# Altium PCB PCB1.PcbDoc
Units mm, origin at the board's own origin, x right, y up, seen from the top; angles counter-clockwise.
Board outline 37 x 28 mm, 2 copper layers (Top Layer, Bottom Layer); 4 components, 4 nets, 22 pads, 0 vias.
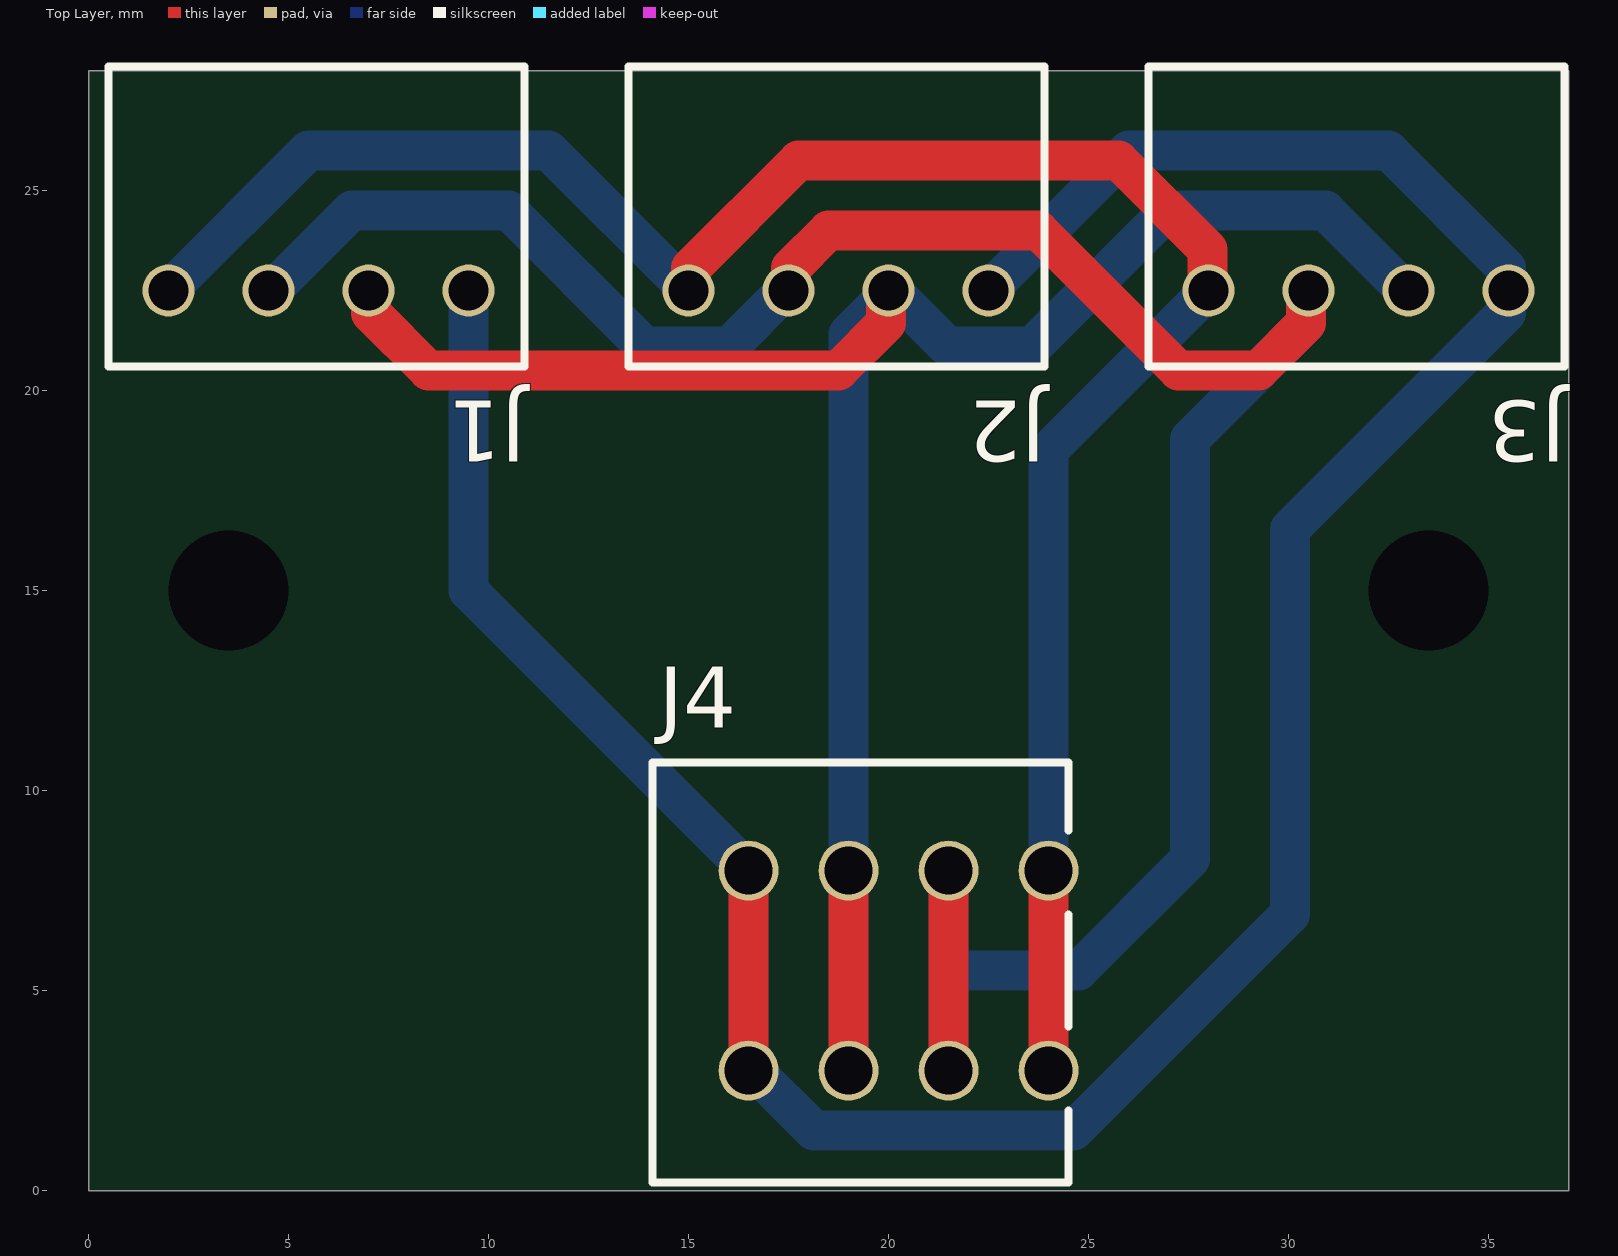
[diagram p0: Top Layer view]
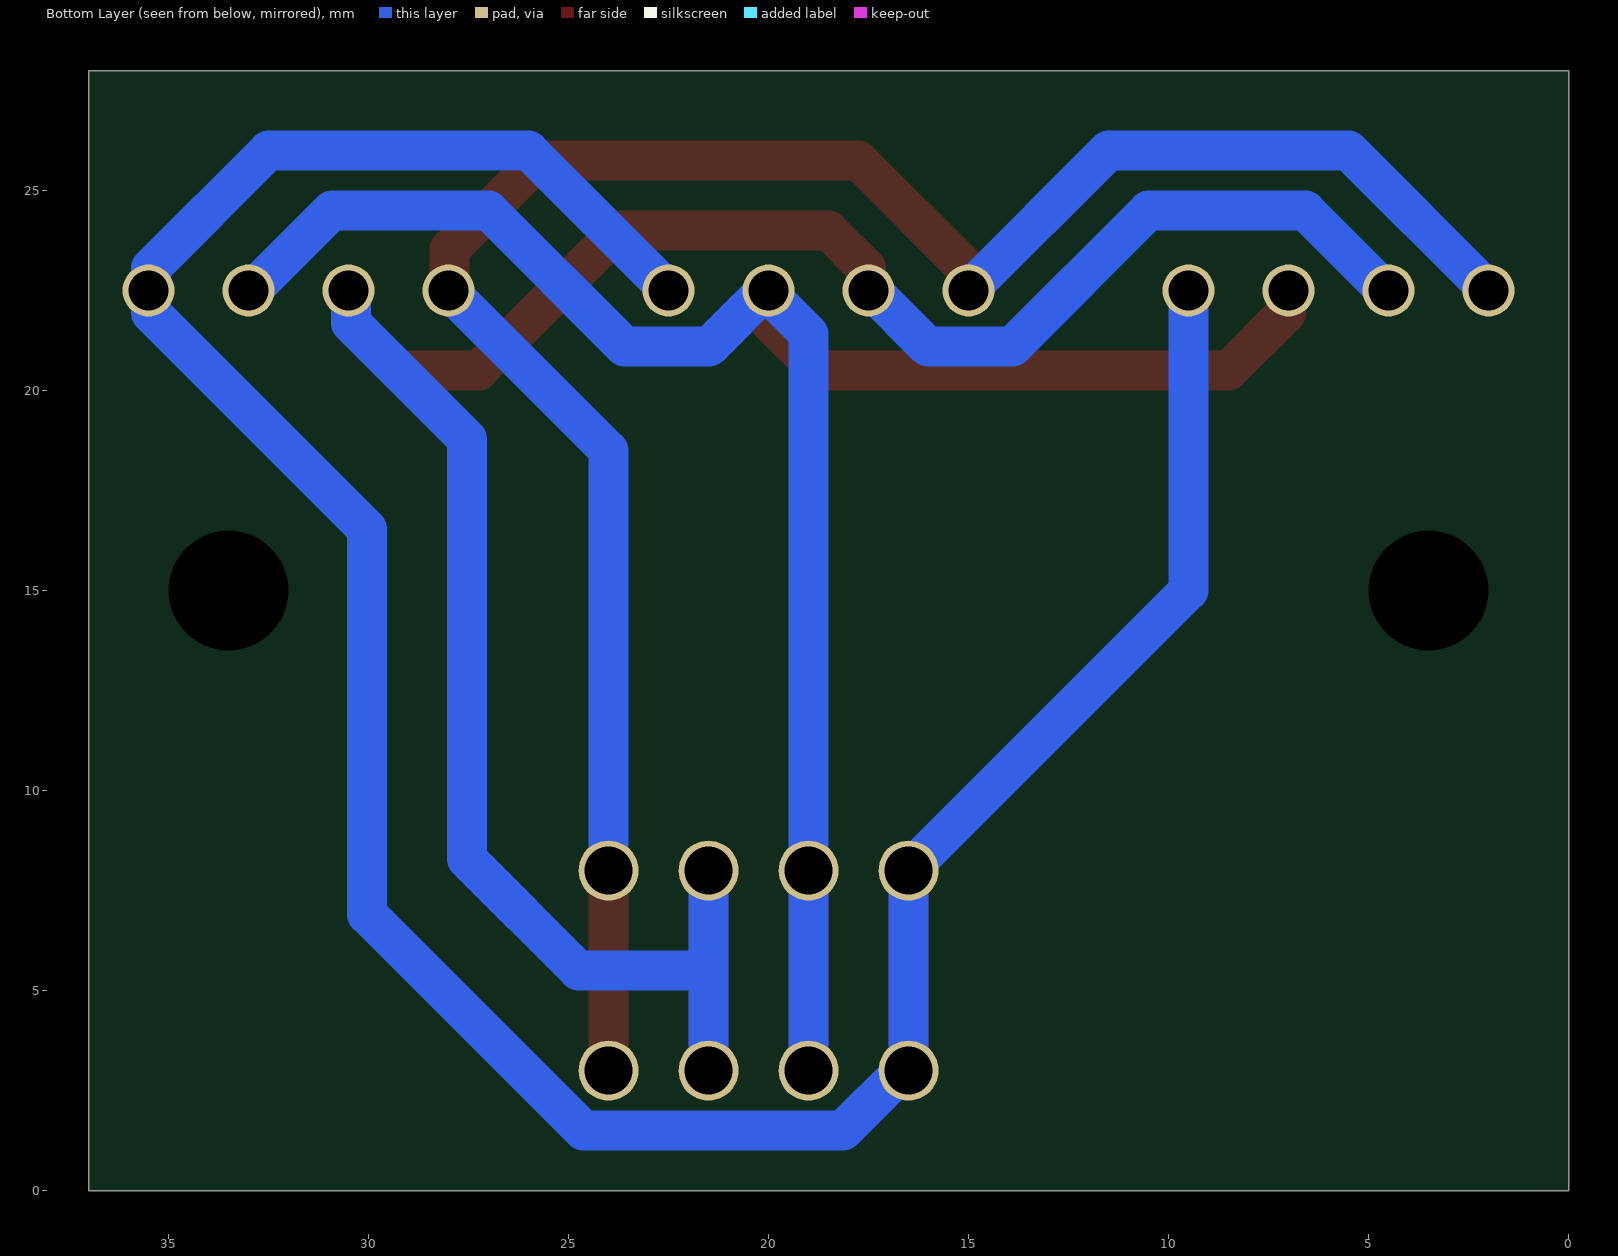
[diagram p1: Bottom Layer view, seen from below]
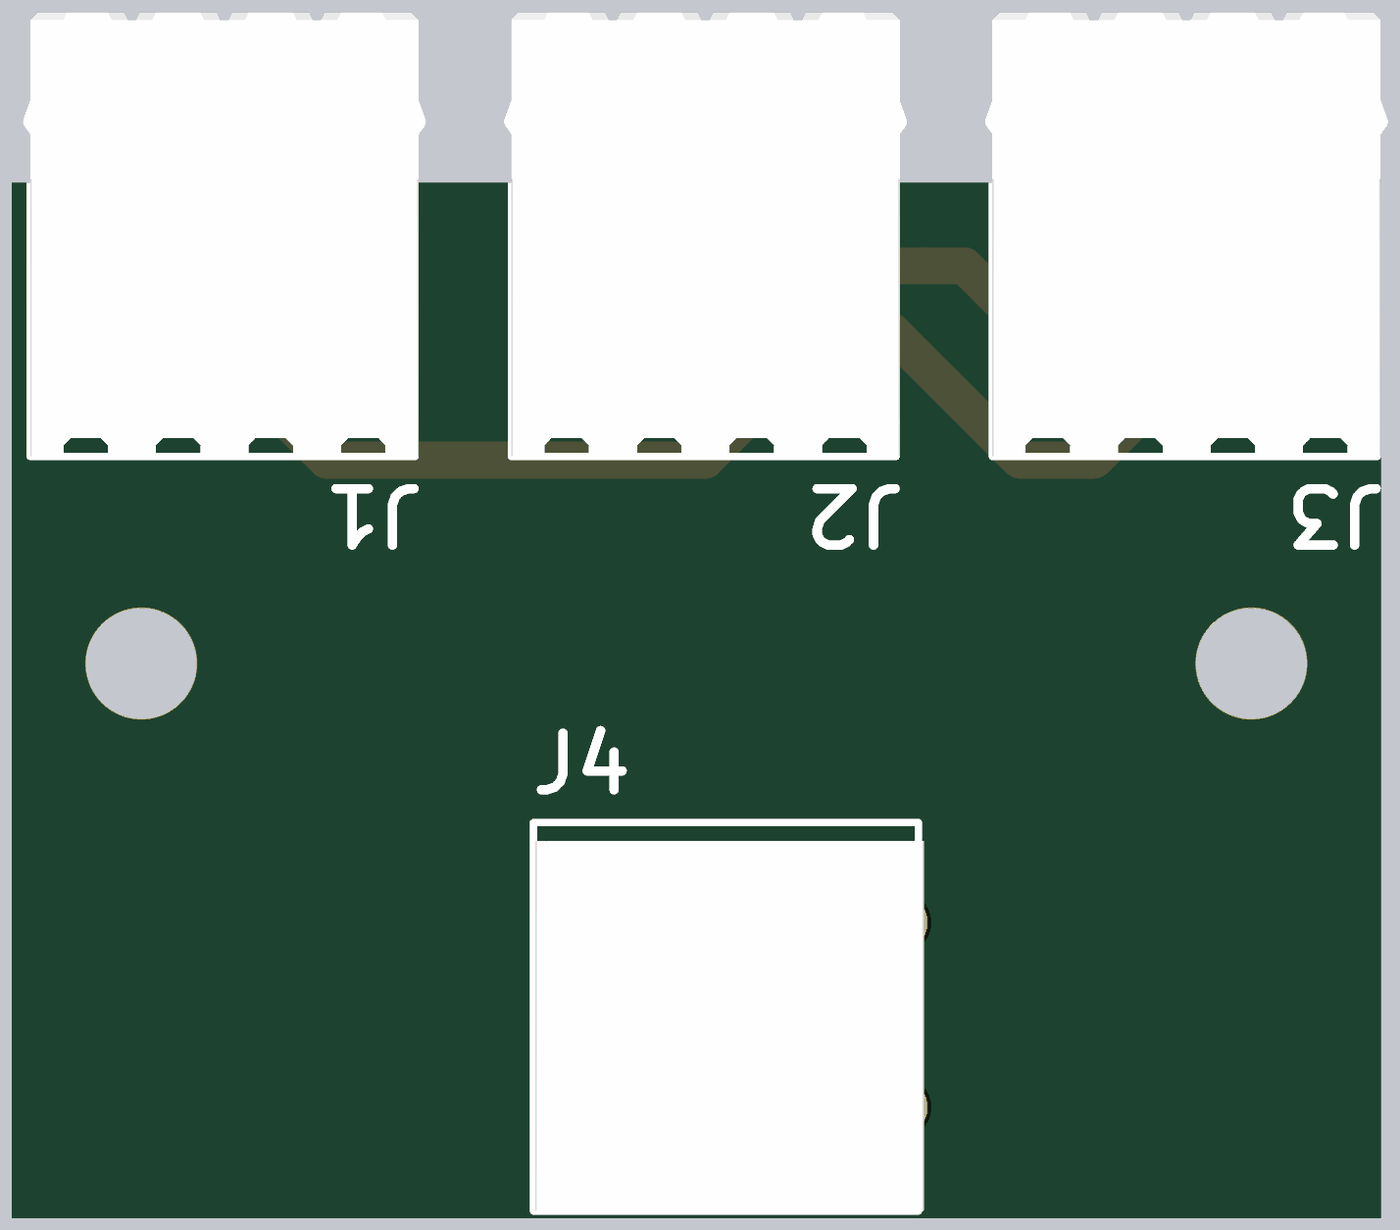
[diagram p2: 3D render of the assembled board from above, using the file's embedded part models]

## Layer stack, top to bottom
Top Solder: solder mask 0.0102, Solder Resist, Dk 3.5
Top Layer: signal copper 0.0356
Dielectric 1: dielectric 0.32, FR-4, Dk 4.8
Bottom Layer: signal copper 0.0356
Bottom Solder: solder mask 0.0102, Solder Resist, Dk 3.5

## Board outline
0,0 0,28 37,28 37,0

## Design rules (kind name [scope] priority, off if disabled: settings)
Clearance [All] p1: gap=0.254 ignorepadtopadclearanceinfootprint=FALSE except(0: Arc-Hole Track-Hole SMDPad-Hole THPad-Hole Via-Hole Fill-Hole Poly-Hole Region-Hole Text-Hole)
PolygonConnect [All] p1: connectstyle=Relief reliefconductorwidth=0.254 reliefentries=4 polygonreliefangle="90 Angle" airgapwidth=0.254
RoutingVias [All] p1: holewidth=0.711 width=1.27 viastyle="Through Hole" minholewidth=0.711 minwidth=1.27 maxholewidth=0.711 maxwidth=1.27
SolderMaskExpansion [All] p1: expansion=0.102 istentingtop=FALSE
Width [All] p1: maxlimit=1 minlimit=0.254 preferedwidth=1 minimp=50.000000 maximp=50.000000 favimp=50.000000
30 further rules are at their usual default settings.

## Components (designator, comment, footprint, x,y, rotation, side; value= is the part's Value field where it differs from the comment)
J1 "Connector_4" "PTSM 0,5/ 4-HHI-2,5-THR WH R32" 9.5,22.5 r180 top
J2 "Connector_4" "PTSM 0,5/ 4-HHI-2,5-THR WH R32" 22.5,22.5 r180 top
J3 "Connector_4" "PTSM 0,5/ 4-HHI-2,5-THR WH R32" 35.5,22.5 r180 top
J4 "Connector_4" "PTSM 0,5/ 4-2,5-H THR WH R32" 16.5,3 r0 top

## Footprints (in the part's own frame and the unit in brackets; to place one, negate y for a bottom-side part, rotate by r counter-clockwise, add the part's x,y. Pads: shape width x height; smd on the part's side, far side on the other; paste and mask are expansions set on the pad)
"PTSM 0,5/ 4-2,5-H THR WH R32" [mm]
  round 1.5 hole 1.2 paste-2539.97: 1(0,0) 1(0,5) 2(2.5,0) 2(2.5,5) 3(5,0) 3(5,5) 4(7.5,0) 4(7.5,5)
  silkscreen extent -2.4,-2.8 8,7.7, body extent -2.35,-2.8 8.15,7.2, height 5
"PTSM 0,5/ 4-HHI-2,5-THR WH R32" [mm]
  round 1.3 hole 1 paste-2539.97: 1(0,0) 2(2.5,0) 3(5,0) 4(7.5,0)
  silkscreen extent -1.4,-5.6 9,1.9, body extent -1.7,-10.1 9.2,1.9, height 5

## Free pads (board coordinates)
  round 0 hole 3 paste-2539.97: 3(33.5,15) 4(3.5,15)

## Nets (pads, with @x,y where several pads share a name; then routed paths per layer and width w, separated by ;. In a path a pad name is that pad's centre, name@x,y a point inside that pad or via, vN(x,y) a via of type N, cw(c..) or ccw(c..) an arc to the next point about the centre after c; other vN are vias at no path point)
NetJ1_1: J1.1 J2.1 J3.1 J4.1 | length 77.8
  Top Layer w1: J4.1@16.5,3 J4.1@16.5,8
  Bottom Layer w1: J1.1 9.5,15 16.5,8 16.5,3 16.635,3 18.139,1.496 24.623,1.496 30.033,6.906 30.033,16.533 35.443,21.943 35.443,22.443 J3.1 35.443,22.557 35.443,23.057 32.5,26 26,26 J2.1
NetJ1_2: J1.2 J2.2 J3.2 J4.2 | length 56.1
  Top Layer w1: J1.2 7.057,22.443 7.057,21.943 8.5,20.5 18.75,20.5 19.943,21.693 19.943,22.443 J2.2 ; J4.2@19,3 J4.2@19,8
  Bottom Layer w1: J4.2@19,3 19,8 19,21.419 20,22.419 J2.2 20.081,22.5 21.485,21.096 23.596,21.096 27,24.5 30.919,24.5 32.919,22.5 J3.2
NetJ1_3: J1.3 J2.3 J3.3 J4.3 | length 65.1
  Top Layer w1: J2.3 17.557,22.557 17.557,23.057 18.5,24 23.75,24 27.25,20.5 29.25,20.5 30.443,21.693 30.443,22.443 J3.3 ; J4.3@21.5,3 J4.3@21.5,8
  Bottom Layer w1: J1.3 4.581,22.5 6.581,24.5 10.5,24.5 13.904,21.096 16.015,21.096 17.419,22.5 J2.3 ; J4.3@21.5,3 21.5,5.5 ; J4.3@21.5,8 21.5,5.5 ; J3.3 30.443,22.443 30.443,21.693 27.533,18.783 27.533,8.283 24.75,5.5 21.5,5.5
NetJ1_4: J1.4 J2.4 J3.4 J4.4 | length 53.6
  Top Layer w1: J2.4 15.057,22.557 15.057,23.057 17.75,25.75 25.75,25.75 27.98,23.52 27.98,22.52 J3.4 ; J4.4@24,3 J4.4@24,8
  Bottom Layer w1: J1.4 5.504,26.004 11.496,26.004 J2.4 ; J4.4@24,8 24,18.5 J3.4

## Silkscreen, mask and mechanical layers (free items; w line width, h text height)
Mechanical 1:
  the board outline again, w0.2